# EAGLE board huskylens_servo-eth (EAGLE 9.2.2)
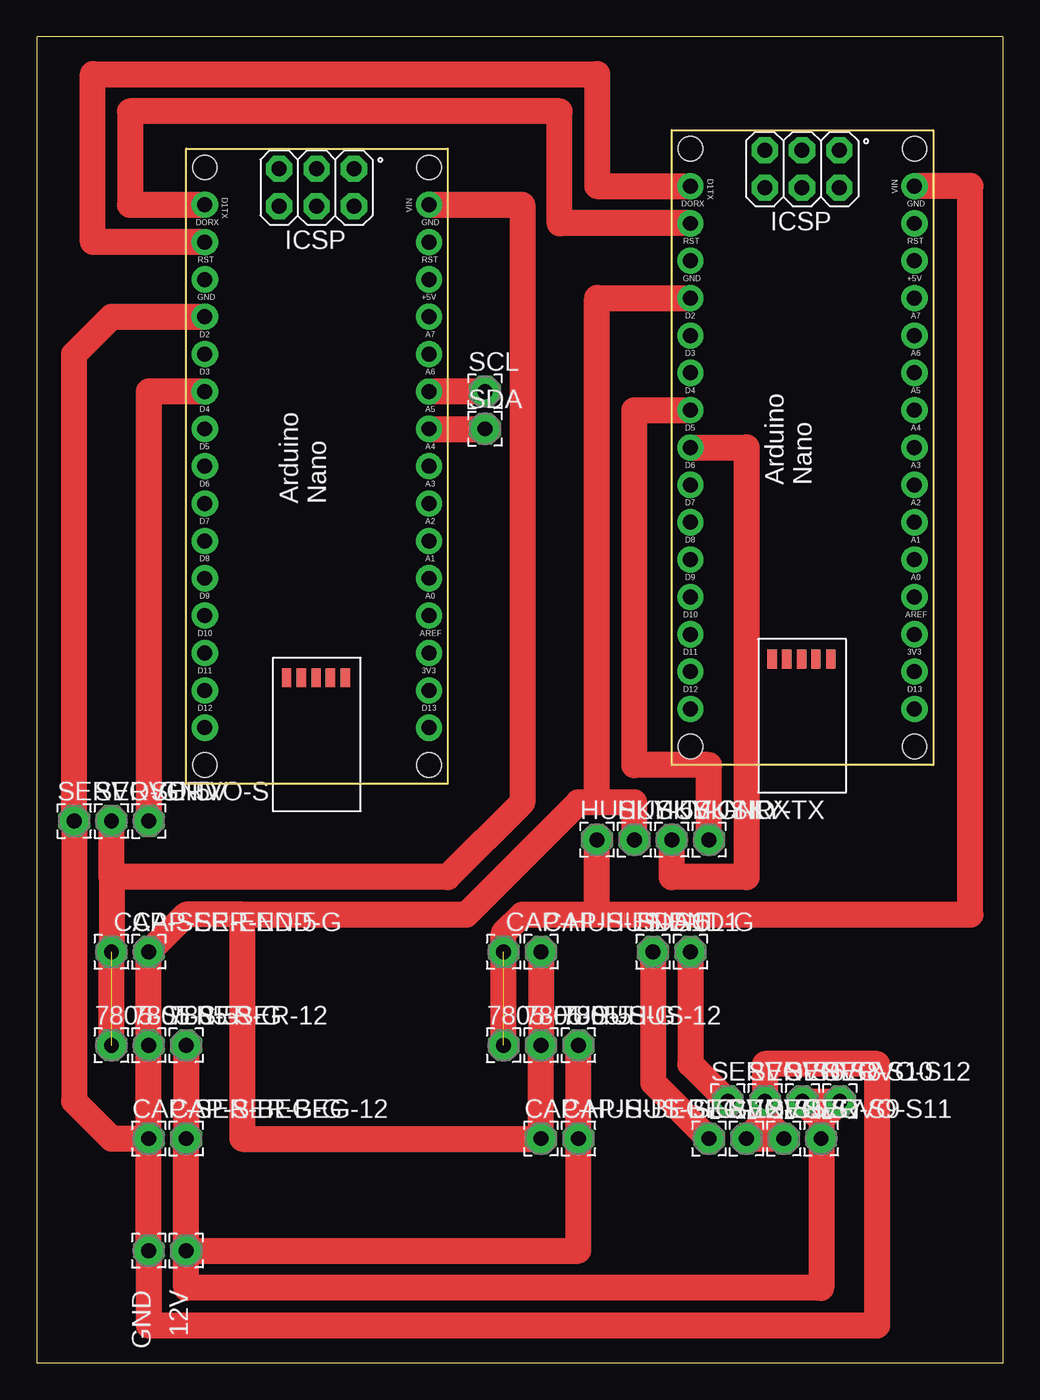
[diagram p0: board, top side]

Size 65.71 x 90.16 mm. Coordinates in mm from the lower left corner, seen from the top.
Outline: 0,0 65.71,0 65.71,90.16 0,90.16 0,0
Copper layers (1*16): Top 0.035mm / dielectric 1.5mm / Bottom 0.035mm
Design rules "default": minimum track width 6mil, minimum drill 0.35mm, track to track 6mil, track to pad 6mil, pad to pad 6mil, via to via 6mil, smd to smd 6mil, copper to edge 40mil, drill to drill 6mil, minimum pad ring 10mil, minimum via ring 8mil, stop-mask expansion 4mil, vias tented up to drill 0mil, thermal gap 10mil
Net classes: 0 default: width 1.778 mm

## Footprints (pad centres in the part's own frame; a part is rotated, then mirrored left to right if it is on the bottom)
2,15/1,0 = drill 1.016 pad 2.159 octagon: 1 0,0
ARDUINO_NANO = drill 1.016 pad 1.778: 3V3 6.35,1.27; 5V 31.75,1.27; A0 11.43,1.27; A1 13.97,1.27; A2 16.51,1.27; A3 19.05,1.27; A4 21.59,1.27; A5 24.13,1.27; A6 26.67,1.27; A7 29.21,1.27; D2 29.21,16.51; D3 26.67,16.51; D4 24.13,16.51; D5 21.59,16.51; D6 19.05,16.51; D7 16.51,16.51; D8 13.97,16.51; D9 11.43,16.51; D10 8.89,16.51; D11 6.35,16.51; D12 3.81,16.51; D13 3.81,1.27; GND 31.75,16.51; GND. 36.83,1.27; REF 8.89,1.27; RST 34.29,16.51; RST. 34.29,1.27; RX1 36.83,16.51; TX1 39.37,16.51; VIN 39.37,1.27 | drill 1.016 pad 1.778 octagon: 5V. 39.268,6.375; GND_ 39.268,11.455; MISO 41.808,6.375; MOSI 39.268,8.915; RESET.. 41.808,11.455; SCK 41.808,8.915 | smd 1.27 x 0.635: <USB>+V 7.214,10.947; <USB>D+ 7.214,9.957; <USB>D- 7.214,8.941; <USB>GND 7.214,6.96; <USB>ID 7.214,7.976 | hole 1.651: 1.27,1.27; 1.27,16.51; 41.91,16.51; 41.91,1.27

## Placement (x,y rotation side)
12V  [2,15/1,0]  10.16,7.62 0 top
7805-HUS-5  [2,15/1,0]  31.75,21.59 0 top
7805-HUS-12  [2,15/1,0]  36.83,21.59 0 top
7805-HUS-G  [2,15/1,0]  34.29,21.59 0 top
7805-SER-5  [2,15/1,0]  5.08,21.59 0 top
7805-SER-12  [2,15/1,0]  10.16,21.59 0 top
7805-SER-G  [2,15/1,0]  7.62,21.59 0 top
CAP-HUS-BEG-12  [2,15/1,0]  36.83,15.24 0 top
CAP-HUS-BEG-G  [2,15/1,0]  34.29,15.24 0 top
CAP-HUS-END-5  [2,15/1,0]  31.75,27.94 0 top
CAP-HUS-END-G  [2,15/1,0]  34.29,27.94 0 top
CAP-SER-BEG-12  [2,15/1,0]  10.16,15.24 0 top
CAP-SER-BEG-G  [2,15/1,0]  7.62,15.24 0 top
CAP-SER-END-5  [2,15/1,0]  5.08,27.94 0 top
CAP-SER-END-G  [2,15/1,0]  7.62,27.94 0 top
GND  [2,15/1,0]  7.62,7.62 0 top
HUSKY-5V  [2,15/1,0]  38.1,35.56 0 top
HUSKY-ARD  ARDUINO_NANO  [ARDUINO_NANO]  60.96,40.64 90 top
HUSKY-GND  [2,15/1,0]  40.64,35.56 0 top
HUSKY-RX  [2,15/1,0]  43.18,35.56 0 top
HUSKY-TX  [2,15/1,0]  45.72,35.56 0 top
SCL  [2,15/1,0]  30.48,66.04 0 top
SCL1  [2,15/1,0]  44.45,27.94 0 top
SDA  [2,15/1,0]  30.48,63.5 0 top
SDA1  [2,15/1,0]  41.91,27.94 0 top
SERVO-5V  [2,15/1,0]  5.08,36.83 0 top
SERVO-ARD  ARDUINO_NANO  [ARDUINO_NANO]  27.94,39.37 90 top
SERVO-GND  [2,15/1,0]  2.54,36.83 0 top
SERVO-S  [2,15/1,0]  7.62,36.83 0 top
SERVO-S5  [2,15/1,0]  45.72,15.24 0 top
SERVO-S6  [2,15/1,0]  46.99,17.78 0 top
SERVO-S7  [2,15/1,0]  48.26,15.24 0 top
SERVO-S8  [2,15/1,0]  49.53,17.78 0 top
SERVO-S9  [2,15/1,0]  50.8,15.24 0 top
SERVO-S10  [2,15/1,0]  52.07,17.78 0 top
SERVO-S11  [2,15/1,0]  53.34,15.24 0 top
SERVO-S12  [2,15/1,0]  54.61,17.78 0 top

## Library data of the parts
12V 7805-HUS-5 7805-HUS-12 7805-HUS-G 7805-SER-5 7805-SER-12 7805-SER-G CAP-HUS-BEG-12 CAP-HUS-BEG-G CAP-HUS-END-5 CAP-HUS-END-G CAP-SER-BEG-12 CAP-SER-BEG-G CAP-SER-END-5 CAP-SER-END-G GND HUSKY-5V HUSKY-GND HUSKY-RX HUSKY-TX SCL SCL1 SDA SDA1 SERVO-5V SERVO-GND SERVO-S SERVO-S5-SERVO-S12 = wirepad
HUSKY-ARD SERVO-ARD = E14_Arduino_revC

## Nets
N$1: HUSKY-ARD.RX1 SERVO-ARD.TX1
N$2: HUSKY-ARD.TX1 SERVO-ARD.RX1
N$3: 7805-HUS-G.1 7805-SER-G.1 CAP-HUS-BEG-G.1 CAP-HUS-END-G.1 CAP-SER-BEG-G.1 CAP-SER-END-G.1 GND.1 HUSKY-ARD.GND HUSKY-GND.1 SERVO-ARD.GND SERVO-GND.1 SERVO-S7.1 SERVO-S8.1 SERVO-S9.1
N$4: HUSKY-ARD.D5 HUSKY-RX.1
N$5: SERVO-ARD.D3 SERVO-S.1
N$6: 12V.1 7805-HUS-12.1 7805-SER-12.1 CAP-HUS-BEG-12.1 CAP-SER-BEG-12.1 SERVO-S10.1 SERVO-S11.1 SERVO-S12.1
N$7: 7805-HUS-5.1 CAP-HUS-END-5.1 HUSKY-5V.1 HUSKY-ARD.VIN
N$8: 7805-SER-5.1 CAP-SER-END-5.1 SERVO-5V.1 SERVO-ARD.VIN
N$9: HUSKY-ARD.D4 HUSKY-TX.1
S$1: SCL.1 SERVO-ARD.A6
S$2: SDA.1 SERVO-ARD.A5
S$3: SDA1.1 SERVO-S5.1
S$4: SCL1.1 SERVO-S6.1

## Tracks (layer width: path | path; a pad name or v marks a point on that pad's centre or on a via)
N$1
  Top 1.778: HUSKY-ARD.RX1 35.56,77.47 35.56,85.09 6.35,85.09 6.35,78.74 SERVO-ARD.TX1
N$2
  Top 1.778: SERVO-ARD.RX1 3.81,76.2 3.81,87.63 38.1,87.63 38.1,80.01 HUSKY-ARD.TX1
N$3
  Top 1.778: HUSKY-GND.1 40.64,38.1 38.1,38.1 | 38.1,38.1 38.1,72.39 HUSKY-ARD.GND | 38.1,38.1 36.83,38.1 29.21,30.48 13.97,30.48 | 13.97,30.48 10.16,30.48 CAP-SER-END-G.1 7805-SER-G.1 CAP-SER-BEG-G.1 | 13.97,30.48 13.97,15.24 CAP-HUS-BEG-G.1 7805-HUS-G.1 CAP-HUS-END-G.1 | CAP-SER-BEG-G.1 GND.1 7.62,2.54 57.15,2.54 57.15,20.32 49.53,20.32 SERVO-S8.1 49.53,16.51 | CAP-SER-BEG-G.1 5.08,15.24 2.54,17.78 SERVO-GND.1 2.54,68.58 5.08,71.12 SERVO-ARD.GND | 49.53,16.51 SERVO-S7.1 SERVO-S9.1 49.53,16.51
N$4
  Top 1.778: HUSKY-ARD.D5 48.26,62.23 48.26,33.02 43.18,33.02 HUSKY-RX.1
N$5
  Top 1.778: SERVO-ARD.D3 7.62,66.04 SERVO-S.1
N$6
  Top 1.778: 12V.1 CAP-SER-BEG-12.1 7805-SER-12.1 | 12V.1 36.83,7.62 CAP-HUS-BEG-12.1 7805-HUS-12.1 | 53.34,16.51 SERVO-S12.1 SERVO-S10.1 53.34,16.51 | 53.34,16.51 SERVO-S11.1 53.34,5.08 10.16,5.08 12V.1
N$7  (1 unrouted)
  Top 1.778: 7805-HUS-5.1 CAP-HUS-END-5.1 31.75,29.21 33.02,30.48 38.1,30.48 | 38.1,30.48 HUSKY-5V.1 | 38.1,30.48 63.5,30.48 63.5,80.01 HUSKY-ARD.VIN
N$8  (4 unrouted)
  Top 1.778: SERVO-ARD.VIN 33.02,78.74 33.02,38.1 27.94,33.02 5.08,33.02 | 5.08,33.02 SERVO-5V.1 | 5.08,33.02 CAP-SER-END-5.1 7805-SER-5.1
N$9
  Top 1.778: HUSKY-TX.1 45.72,40.64 40.64,40.64 40.64,64.77 HUSKY-ARD.D4
S$1
  Top 1.778: SCL.1 SERVO-ARD.A6
S$2
  Top 1.778: SERVO-ARD.A5 SDA.1
S$3
  Top 1.778: SERVO-S5.1 41.91,19.05 SDA1.1
S$4
  Top 1.778: SCL1.1 44.45,20.32 SERVO-S6.1